# Altium PCB Transmitter.PcbDoc
Units mm, origin at the board's own origin, x right, y up, seen from the top; angles counter-clockwise.
Board outline 50 x 40 mm, 2 copper layers (Top Layer, Bottom Layer); 14 components, 19 nets, 68 pads, 7 vias.
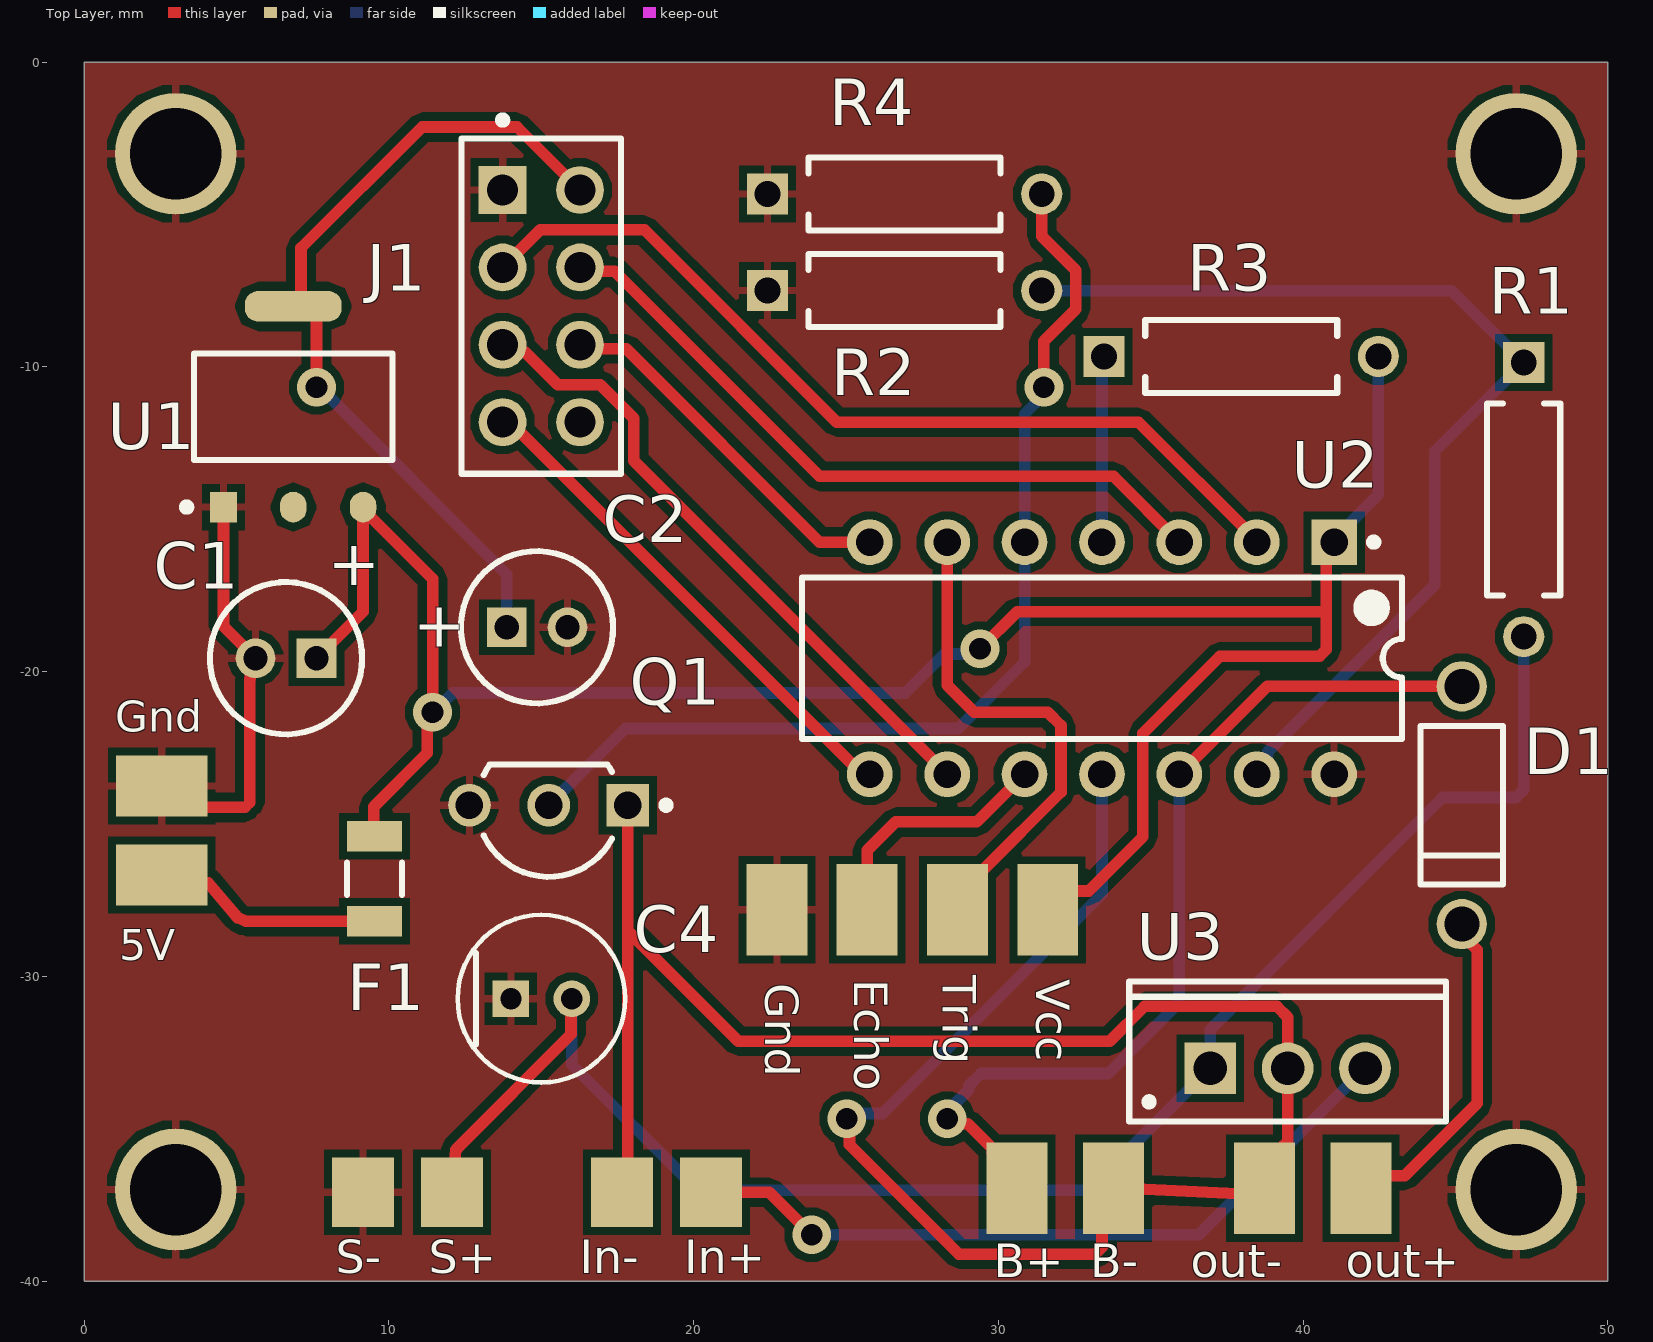
[diagram p0: Top Layer view]
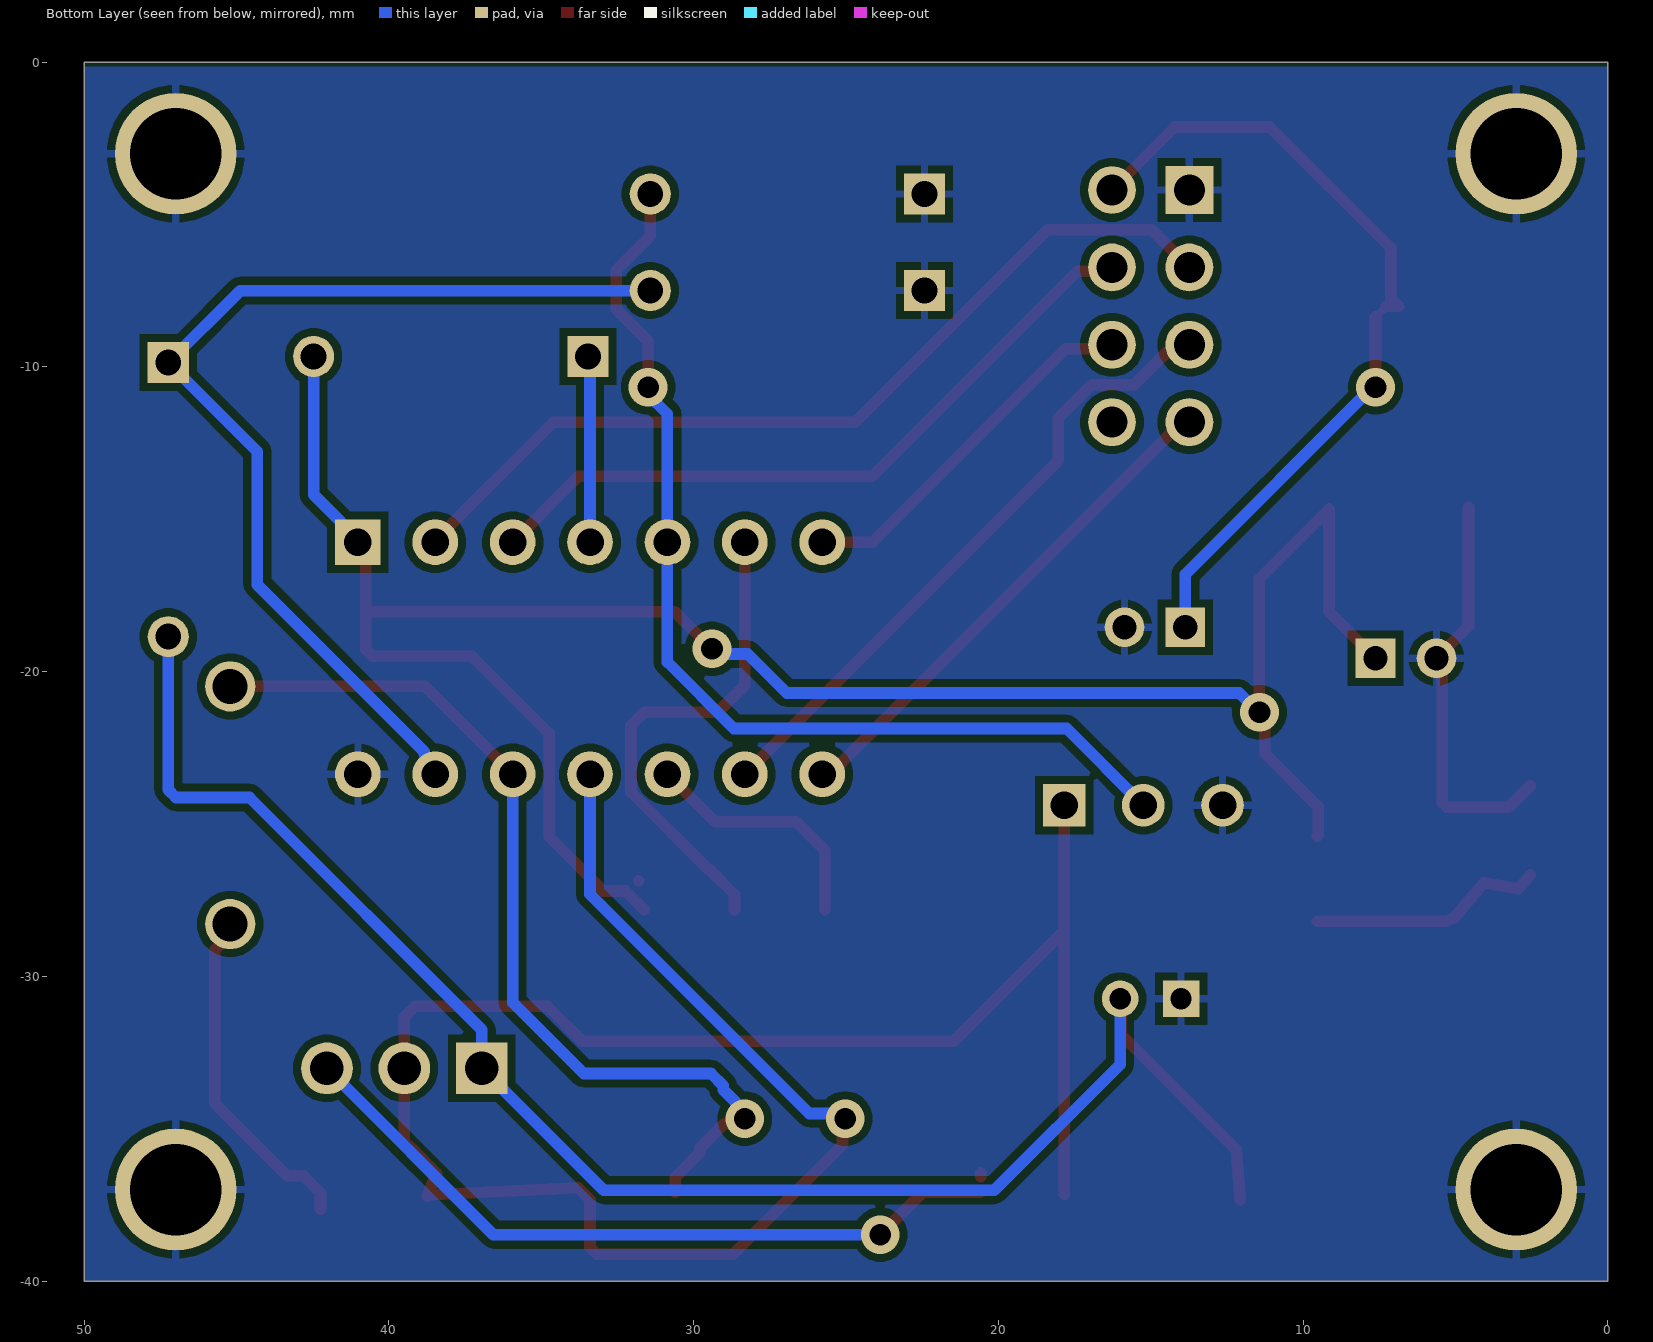
[diagram p1: Bottom Layer view, seen from below]

## Layer stack, top to bottom
Top Solder: solder mask 0.0102, Solder Resist, Dk 3.5
Top Layer: signal copper 0.0356
Dielectric 1: dielectric 0.32, FR-4, Dk 4.8
Bottom Layer: signal copper 0.0356
Bottom Solder: solder mask 0.0102, Solder Resist, Dk 3.5

## Board outline
0,0 50,0 50,-40 0,-40

## Design rules (kind name [scope] priority, off if disabled: settings)
Clearance Clearance_1 [OnMid vs OnMid] p1: gap=0.254 ignorepadtopadclearanceinfootprint=FALSE sourcerule=38 cellrowname=All cellrowtype=0 cellcolname=All cellcoltype=0 innerlayers=TRUE
Clearance Clearance_2 [(ExistsOnLayer('Top Layer') Or ExistsOnLayer('Bottom Layer')) vs (ExistsOnLayer('Top Layer') Or ExistsOnLayer('Bottom Layer'))] p2: gap=0.254 ignorepadtopadclearanceinfootprint=FALSE sourcerule=38 cellrowname=All cellrowtype=0 cellcolname=All cellcoltype=0 outerlayers=TRUE
Clearance [All] p3: gap=0.254 ignorepadtopadclearanceinfootprint=FALSE ismatrix=TRUE
HoleSize MaxMinHoleSize_2 [All] p1: absolutevalues=TRUE maxlimit=4.54 minlimit=0.025 maxpercent=80.000 minpercent=20.000
PolygonConnect [All] p1: connectstyle=Relief reliefconductorwidth=0.254 reliefentries=4 polygonreliefangle="90 Angle" airgapwidth=0.254
RoutingVias [All] p1: holewidth=0.711 width=1.27 viastyle="Through Hole" minholewidth=0.711 minwidth=1.27 maxholewidth=0.711 maxwidth=1.27
SilkToSolderMaskClearance SilkToSolderMaskClearance_1 [All] p1: minsilkscreentomaskgap=0 clearancetoexposedcopper=TRUE
SilkToSolderMaskClearance [IsPad] p2: minsilkscreentomaskgap=0.254 clearancetoexposedcopper=TRUE
SolderMaskExpansion [All] p1: expansion=0.102 istentingtop=FALSE
Width MaxMinWidth_1 [All] p1: maxlimit=0.381 minlimit=0.254 preferedwidth=0.254 minimp=50.000000 maximp=50.000000 favimp=50.000000
Width MaxMinWidth_2 [All] p2: maxlimit=0.254 minlimit=0.254 preferedwidth=0.254
28 further rules are at their usual default settings.

## Components (designator, comment, footprint, x,y, rotation, side; value= is the part's Value field where it differs from the comment)
C1 "ECA-1HHG010" CAPPR55-200-1100X500X1200 6.62,-19.558 r180 top value=1µF
C2 "ECA-1HHG010" CAPPR55-200-1100X500X1200 14.859,-18.542 r0 top value=1µF
C4 "EEUFR1H100" FP-RAD-TH-D_5_0_5-L_11_1-MFG 15.002,-30.734 r0 top
D1 "1N4007" FAIR-DO-41-2 45.212,-24.384 r270 top
F1 "1206L050/15YR" FP-1206L-MFG 9.525,-26.797 r90 top value=0.15-0.75Ω
J1 "PPTC042LFBN-RC" FP-PPTC042LFBN-RC-MFG 15,-8 r270 top
Q1 "BS170RLRAG" ONSC-TO-92-3-29-11_AM_BL 15.24,-24.384 r180 top
R1 "MFR-25FBF52-1K" RESA60-630X240 47.244,-14.351 r270 top value=500k
R2 "MFR-25FBF52-1K" RESA60-630X240 26.924,-7.493 r0 top value=500k
R3 "MFR-25FBF52-1K" RESA60-630X240 37.973,-9.652 r0 top value=10k
R4 "MFR-25FBF52-1K" RESA60-630X240 26.924,-4.318 r0 top value=10k
U1 "AMS1117-3.3" FP-AMS1117-IPC_C 6.858,-11.303 r90 top
U2 "ATtiny84-20PU" 14P3 33.401,-19.558 r270 top
U3 "L7805CV" TO220 39.497,-33.02 r0 top

## Footprints (in the part's own frame and the unit in brackets; to place one, negate y for a bottom-side part, rotate by r counter-clockwise, add the part's x,y. Pads: shape width x height; smd on the part's side, far side on the other; paste and mask are expansions set on the pad)
14P3 [mm] "DIP, 14-Pin, Row Spacing 7.62 mm, Pitch 2.54 mm"
  rect 1.5x1.5 hole 0.9: 1(-3.81,7.62)
  round 1.5 hole 0.9: 2(-3.81,5.08) 3(-3.81,2.54) 4(-3.81,0) 5(-3.81,-2.54) 6(-3.81,-5.08) 7(-3.81,-7.62) 8(3.81,-7.62) 9(3.81,-5.08) 10(3.81,-2.54) 11(3.81,0) 12(3.81,2.54) 13(3.81,5.08) 14(3.81,7.62)
  silkscreen extent -3.93,-9.85 2.65,9.85, body extent -3.55,-9.85 3.55,9.85, height 5.33
CAPPR55-200-1100X500X1200 [mm] "THD, 2-Leads, Dia 5mm, Pin Spacing 2mm"
  rect 1.3x1.3 hole 0.8: 1(-1,0)
  round 1.3 hole 0.8: 2(1,0)
  silkscreen extent -2.5,-2.5 2.5,2.5, body extent -2.5,-2.5 2.45,2.5, height 12
FAIR-DO-41-2 [mm] "THD, 2-Leads, Body 5.2x2.72mm, Pin Spacing 7.8mm"
  round 1.65 hole 1.15: 1(-3.9,0) 2(3.9,0)
  silkscreen extent -2.6,-1.35 2.6,1.35, body extent -4.29,-1.17 4.29,1.17, height 2.35
FP-1206L-MFG [mm]
  rect 1x1.8 smd paste+0 mask+0: 1(-1.4,0) 2(1.4,0)
  silkscreen extent -0.53,-0.9 0.53,0.9, body extent -2,-1 2,1, height 0.25
FP-AMS1117-IPC_C [mm]
  rect 1.004x0.872 smd paste+0 mask+0: 1(-3.295,2.29)
  rrect100% 1.004x0.872 smd paste+0 mask+0: 2(-3.295,0) 3(-3.295,-2.29)
  rrect87% 1.004x3.182 smd paste+0 mask+0: 4(3.295,0)
  silkscreen extent -3.42,-3.25 1.75,3.62, body extent -3.9,-3.35 3.9,3.35, height 0.25
FP-PPTC042LFBN-RC-MFG [mm]
  rect 1.57x1.57 hole 1.02 paste-2539.97 mask+0: 1(-3.81,-1.27)
  round 1.57 hole 1.02 paste-2539.97 mask+0: 2(-3.81,1.27) 3(-1.27,-1.27) 4(-1.27,1.27) 5(1.27,-1.27) 6(1.27,1.27) 7(3.81,-1.27) 8(3.81,1.27)
  silkscreen extent -6.23,-2.62 5.51,2.62, body extent -5.61,-2.72 5.61,2.72, height 0.25
FP-RAD-TH-D_5_0_5-L_11_1-MFG [mm]
  rect 1.2x1.2 hole 0.7 paste-2539.97 mask+0: 1(-1,0)
  round 1.2 hole 0.7 paste-2539.97 mask+0: 2(1,0)
  silkscreen extent -2.75,-2.75 2.75,2.75, body extent -2.85,-2.85 2.85,2.85, height 0.25
ONSC-TO-92-3-29-11_AM_BL [mm] "TO, 3-Leads, Body Dia 4.7mm, Pitch 2.6mm"
  rect 1.4x1.4 hole 0.9: 1(-2.6,0)
  round 1.4 hole 0.9: 2(0,0) 3(2.6,0)
  silkscreen extent -3.98,-1.34 2.13,2.35, body extent -2.84,-1.34 2.84,2.35, height 5.33
RESA60-630X240 [mm] "Axial Resistor, 2-Leads, Dia 2.4mm, Body Length 6.3mm"
  rect 1.35x1.35 hole 0.85: 1(-4.5,0)
  round 1.35 hole 0.85: 2(4.5,0)
  silkscreen extent -3.15,-1.2 3.15,1.2, body extent -4.77,-1.19 4.77,1.2, height 2.4
TO220 [mm] "TO, Thru-Hole, Vertical, Heatsink Mounted; 3 In-Line Leads; Pitch 2.54 mm"
  rect 1.7x1.7 hole 1.1: 1(-2.54,0)
  round 1.7 hole 1.1: 2(0,0) 3(2.54,0)
  silkscreen extent -5.2,-1.75 5.2,2.85, body extent -5.25,-1.8 5.25,2.9, height 19.7

## Part data
C1 C2: library part CMP-001-00024-7, "Aluminum Electrolytic Capacitor, 1 uF, +/- 20%, 50 V, -55 to 105 degC, 2-Pin THD, RoHS, Bulk", Capacitor Type=Electrolytic, Case/Package=Radial, Manufacturer=Panasonic, Max Operating Temperature=105°C, Min Operating Temperature=-55°C, Package Description="2-Pin Radial Lead, Dia 5 mm, Height 12 mm", Package Quantity=200, Package Reference=CAPPR55-200-1100X500X1200, Ripple Current=10mA, Tolerance=20%, Voltage Rating=50V, Datasheet URL=https://datasheet.ciiva.com/7275/94060-7275472.pdf, Datasheet Version=Mar-05, Diameter=5mm, Lead Pitch=2mm, Manufacturer URL=http://www.panasonic.com/, Mounting Technology=TH, Packaging=Bulk, Pins=2, Ripple Current (AC)=10mA, RoHS Compliant=True
C4: library part CMP-05427-001295-1, "Aluminum Electrolytic Capacitors (Radial Lead Type) 10uF ±20% 50V", Capacitance=10uF, Case/Package=Radial, Max Operating Temperature=105°C, Min Operating Temperature=-40°C, Ripple Current (AC)=250mA, Tolerance=20%, Voltage=50V, Construction=RADIAL, Diameter=5mm, Height=11mm, Impedance=340mR, Lead Diameter=0.5mm, Lead Pitch=2mm, Life (Hours)=5000Hour, REACH SVHC=Yes, RoHS Compliant=Yes, Series="FR Radial", Termination=Radial, Voltage Rating=50V
D1: library part CMP-004-00007-2, "General Purpose Rectifier, 1.1 V, 1.0 A, -55 to 175 degC, 2-Pin DO-41, RoHS, Tape and Reel", Case/Package=DO-41-2, Forward Current=1A, Forward Voltage=1.1V, Manufacturer=Fairchild, Max Operating Temperature=175°C, Max Surge Current=30A, Min Operating Temperature=-55°C, Package Description="2-Pin Axial Lead, Dia 2.375 mm, Body Length 4.63 mm", Package Quantity=5000, Package Version="Rev. 2, 09/2008", Peak Reverse Current=5uA, Datasheet URL=https://www.fairchildsemi.com/datasheets/1N/1N4007.pdf, Datasheet Version="Rev. 1.1.0, 11/2014", Elements=1, Manufacturer URL=https://www.fairchildsemi.com/, Mounting Technology=TH, Package Reference=DO-41-2, Package URL=http://www.fairchildsemi.com/dwg/DO/DO41A.pdf, Packaging=TapeandReel, Pins=2, RoHS Compliant=True
F1: library part CMP-08606-000030-1, "PTC RESET FUSE 15V 500MA 1206", Ambient Temperature Range High=+85°C, Ambient Temperature Range Low=-40°C, Current Rating=100A, Hold Current=0.5A, Manufacturer="Littelfuse Inc", Package=1206L, Resistance=0.15-0.75Ω, Temperature="-40°C to +85°C", Trip Current=1A, Voltage Rating=15V, Automotive=No, Category=Fuse, ComponentLink2Description=Datasheet, ComponentLink2URL=https://www.littelfuse.com/~/media/electronics/datasheets/resettable_ptcs/littelfuse_ptc_1206l_datasheet.pdf.pdf, Device Class L1="Circuit Protection", Device Class L2="PTC Resettable Fuses", Device Class L3=unset, Digikey Description="PTC RESET FUSE 15V 500MA 1206", Height=0.75mm, Lead Free=Yes, Manufacturer Part Number=1206L050/15YR, Mouser Description="Resettable Fuses - PPTC 15V 1206 .500A POLYFUSE", Octopart=https://octopart.com/1206l050%2F15yr-littelfuse-673645, RoHS=TRUE, Temperature Range High=+85°C, Temperature Range Low=-40°C, Trip Time=0.1s
J1: library part CMP-25680-000004-1, "CONN HDR 8POS 0.1 TIN PCB", Current Rating=3A, Manufacturer=Sullins, Temperature="-40°C to +105°C", Temperature Range High=+105°C, Temperature Range Low=-40°C, Voltage Rating=250V, Automotive=No, Category=Conn, ComponentLink2Description=Datasheet, ComponentLink2URL=https://drawings-pdf.s3.amazonaws.com/10492.pdf, Conn Gender=Female, Conn Orientation=Straight, Contact Material=Tin,Nickel, Device Class L1=Connectors, Device Class L2="Headers and Wire Housings", Device Class L3=unset, Digikey Description="CONN HDR 8POS 0.1 TIN PCB", Height=8.65mm, Is Female=yes, Lead Free=Yes, Manufacturer Part Number=PPTC042LFBN-RC, Number of Contacts=8, Number of Rows=2, Octopart=https://octopart.com/pptc042lfbn-rc-sullins-271088, Package=PPTC042LFBN-RC, Pitch=2.54mm, RoHS=TRUE
Q1: library part CMP-1058-00945-1, "Small Signal MOSFET, 500 mA, 60 V, N-Channel, 3-Pin TO-92, Pb-Free, Tape and Reel", Manufacturer="On Semiconductor", Package Type=TO-92, Channel Polarity="N Channel", ComponentLink1Description="Manufacturer URL", ComponentLink1URL=http://www.onsemi.com/, ComponentLink2Description=Datasheet, ComponentLink2URL=http://www.onsemi.com/pub_link/Collateral/BS170-D.PDF, ComponentLink3Description="Package Specification", ComponentLink3URL=http://www.onsemi.com/pub_link/Collateral/MAC97-D.PDF, Configuration=Single, DatasheetVersion="Rev. 6", ID Max (A)=0.5, Mounting Technology="Through Hole", PackageDescription="3-Pin Transistor Outline, Body 4.825 x 3.685 mm, Pitch 1.27 mm", PackageReference=TO-92-3-29-11_AM_BL, PackageVersion="Rev. AM", Packing="Tape and Reel", PartNumber=BS170RLRAG, PD Max (W)=0.35, RoHS=Pb-Free, V(BR)DSS Min (V)=60, VGS Max (V)=20, VGS(th) Max (V)=3
R1 R2 R3 R4: library part CMP-009-00048-4, "Axial Resistor, 1 KOhm, +/- 1%, 250 mW, -55 to 155 degC, 2-Pin THD, RoHS, Bulk", Case/Package=Axial, Manufacturer=Yageo, Max Operating Temperature=155°C, Min Operating Temperature=-55°C, Package Description="2-Pin Axial Lead, Dia 2.4 mm, Body Length 6.3 mm", Package Quantity=200, Package Reference=MFR-25, Power=250mW, Tolerance=1%, Voltage Rating=250V, Composition=CarbonFilm, Datasheet URL=http://www.yageo.com/documents/recent/Yageo%20LR_MFR_2013.pdf, Datasheet Version=Apr-13, Manufacturer URL=http://www.yageo.com/, Mounting Technology=TH, Packaging=Bulk, RoHS Compliant=True
U1: library part CMP-209535-000001-1, "LDO Voltage Regulators 1A, 3.3V", Dropout Voltage=1.1V, Manufacturer="Advanced Monolithic Systems", Max Junction Temp=+125°C, Max Power Dissipation=1.2W, Max Supply Voltage=15V, Nominal Supply Current=5mA, Output Current=1A, Output Voltage=3.3V, Package=AMS1117, Temperature="-40°C to +125°C", Temperature Range Low=-40°C, Automotive=No, Category=IC, ComponentLink2Description=Datasheet, ComponentLink2URL=http://www.advanced-monolithic.com/pdf/ds1117.pdf, Device Class L1="Integrated Circuits (ICs)", Device Class L2="Power Management ICs", Device Class L3="Voltage Regulators - Linear", Height=1.8mm, Ipc Land Pattern Name=SOT229P700X180-4, Lead Free=Yes, Manufacturer Part Number=AMS1117-3.3, Number Of Outputs=1, Octopart=https://octopart.com/ams1117-3.3-advanced+monolithic+systems-25899300, Output Type=Fixed, RoHS=TRUE, Standoff Height=0.64mm, Temperature Range High=+125°C
U2: library part CMP-0093-00026-2, "8-bit AVR Microcontroller, 20MHz, 2.7-5.5V, 8KB Flash, 512 Bytes EEPROM, 512 Bytes SRAM, 14-pin PDIP, Industrial Grade (-40°C to 85°C), Pb-Free", Code_JEDEC=MS-001-AA, ComponentLink1Description="Manufacturer URL", ComponentLink1URL=http://www.atmel.com/, ComponentLink2Description="ATtiny24/44/84 Datasheet", ComponentLink2URL=http://www.atmel.com/dyn/resources/prod_documents/doc8006.pdf, ComponentLink3Description="ATtiny24/44/84 Summary", ComponentLink3URL=http://www.atmel.com/dyn/resources/prod_documents/8006S.pdf, DatasheetVersion="revK, Oct-2010", PackageDescription="14-Lead Plastic Dual In-Line, 300 mil/7.62 mm Wide Body (PDIP)", PackageReference=14P3, PackageVersion="revB, Oct-2010", RevisionNote="DatasheetVersion updated. URLs added."
U3: library part CMP-0244-00483-1, "Positive Voltage Regulator, 5V, 3-Pin TO-220", ComponentLink1Description="Manufacturer URL", ComponentLink1URL=http://www.st.com, ComponentLink2Description=Datasheet, ComponentLink2URL=http://www.st.com/internet/com/TECHNICAL_RESOURCES/TECHNICAL_LITERATURE/DATASHEET/CD00000444.pdf, ComponentLink3Description="Package Specification", ComponentLink3URL=http://www.st.com/internet/com/TECHNICAL_RESOURCES/TECHNICAL_LITERATURE/PACKAGE_INFORMATION/CD00004649.pdf, DatasheetVersion=16/11/2011, PackageDescription="TO, Thru-Hole, Vertical, Heatsink Mounted; 3 In-Line Leads; Pitch 2.54 mm", PackageReference=TO220, PackageVersion=ver3.0

## Free pads (board coordinates)
  round 4 hole 3: 46(3,-37) 46(3,-3) 46(47,-37) 46(47,-3)
  rect 3x2 smd: 47(2.54,-26.67) 47(2.54,-23.749)
  rect 2.032x2.286 smd: 47(9.144,-37.084) 47(12.065,-37.084) 47(17.653,-37.084) 47(20.574,-37.084)
  rect 2x3 smd: 47(22.733,-27.813) 47(25.696,-27.813) 47(28.66,-27.813) 47(30.607,-36.957) 47(31.623,-27.813) 47(33.782,-36.957) 47(38.735,-36.957) 47(41.91,-36.957)

## Via types
v1: diameter 1.27, hole 0.711, Top Layer to Bottom Layer, 7 vias

## Nets (pads, with @x,y where several pads share a name; then routed paths per layer and width w, separated by ;. In a path a pad name is that pad's centre, name@x,y a point inside that pad or via, vN(x,y) a via of type N, cw(c..) or ccw(c..) an arc to the next point about the centre after c; other vN are vias at no path point)
GND: C1.2 C2.2 C4.1 J1.1 pad.46 pad.47@2.54,-23.749 pad.47@9.144,-37.084 pad.47@22.733,-27.813 Q1.3 R2.1 R4.1 U1.1 U2.14 | length 13.5
  Top Layer w0.254: 5.275,-24.454 5.434,-24.295
  Top Layer w0.381: pad.47@2.54,-23.749 3.245,-24.454 5.275,-24.454 ; U1.1 4.568,-18.506 C1.2 5.444,-19.734 5.444,-20.23 5.434,-20.241 5.434,-24.295
Net3.7V_1: D1.1 pad.47@30.607,-36.957 U2.12 | length 31.3
  Top Layer w0.381: v1(28.321,-34.671) 28.491,-34.841 28.991,-34.841 29.797,-35.648 29.797,-35.794 30.607,-36.603 pad.47@30.607,-37.084 ; U2.12 38.825,-20.484 D1.1 D1.1@45.429,-20.701
  Bottom Layer w0.381: v1(28.321,-34.671) 28.321,-34.43 29.03,-33.722 29.03,-33.591 29.432,-33.189 33.613,-33.189 35.941,-30.861 U2.12
Net3.7V_2: pad.47@17.653,-37.084 pad.47@33.782,-36.957 pad.47@38.735,-36.957 Q1.1 U2.11 U3.2 | length 76.1
  Top Layer w0.381: pad.47@17.84,-37.151 17.84,-28.508 ; Q1.1 17.84,-28.508 ; v1(25.029,-34.671) 25.115,-34.757 25.115,-35.529 28.702,-39.116 33.178,-39.116 33.401,-38.893 33.401,-37.338 pad.47@33.782,-36.957 ; pad.47@33.789,-36.944 38.556,-37.171 38.735,-37.211 38.439,-36.457 39.248,-35.648 39.274,-35.648 39.497,-35.424 U3.2 39.497,-31.338 39.147,-30.988 34.798,-30.988 33.655,-32.131 21.463,-32.131 17.84,-28.508
  Bottom Layer w0.381: v1(25.029,-34.671) 25.199,-34.501 26.205,-34.501 33.401,-27.305 33.401,-25.146 U2.11
Net4.2V_1: pad.47@20.574,-37.084 U3.3 | length 24.8
  Top Layer w0.381: pad.47@20.574,-37.084 22.479,-37.084 v1(23.876,-38.481) ; pad.47@20.574,-36.576 pad.47@20.574,-36.449 ; U3.3@41.68,-33.02 U3.3
  Bottom Layer w0.381: v1(23.876,-38.481) 36.576,-38.481 U3.3
Net7V_1: C4.2 pad.47@12.065,-37.084 R1.2 U3.1 | length 54.5
  Top Layer w0.381: pad.47@12.065,-37.338 12.192,-35.687 15.973,-31.906 15.973,-30.763 C4.2
  Bottom Layer w0.381: C4.2 16.002,-32.893 20.13,-37.02 32.956,-37.02 U3.1 36.957,-31.75 44.577,-24.13 46.99,-24.13 47.244,-23.876 R1.2
NetC1_1: C1.1 F1.2 pad.47@31.623,-27.813 R3.2 U1.3 U2.1 | length 73.8
  Top Layer w0.254: U1.3@9.148,-14.664 U1.3
  Top Layer w0.381: C1.1 9.148,-18.03 9.148,-14.664 11.43,-16.946 v1(11.43,-21.336) 11.26,-21.506 11.26,-22.668 9.497,-24.431 9.497,-25.369 F1.2 ; v1(29.4,-19.25) 30.616,-18.034 40.767,-18.034 ; pad.47@31.623,-27.813 32.237,-27.199 32.971,-27.199 34.747,-25.424 34.747,-23.863 34.746,-22.023 37.274,-19.495 40.544,-19.495 40.767,-19.272 40.767,-18.034 ; pad.47@31.802,-26.864 pad.47@31.806,-26.868 ; U2.1 40.767,-16.002 40.767,-18.034
  Bottom Layer w0.381: v1(11.43,-21.336) 11.463,-21.336 12.098,-20.701 26.945,-20.701 28.226,-19.42 29.23,-19.42 v1(29.4,-19.25) ; U2.1 41.581,-15.188 41.581,-15.083 42.473,-14.19 R3.2
NetC2_1: C2.1 J1.2 U1.4 | length 27.3
  Top Layer w0.254: U1.4@7.377,-8.117 U1.4@7.62,-8.36
  Top Layer w0.381: U1.4@7.268,-8.008 U1.4 7.112,-7.754 7.112,-6.096 11.087,-2.121 14.201,-2.121 J1.2 ; v1(7.62,-10.668) U1.4@7.62,-8.36
  Bottom Layer w0.381: v1(7.62,-10.668) 7.726,-10.668 13.859,-16.801 C2.1
NetC3_2: D1.2 pad.47@41.91,-36.957 | length 11.3
  Top Layer w0.381: pad.47@42.249,-37.636 42.249,-37.098 42.804,-36.542 43.343,-36.542 45.72,-34.165 45.72,-29.135 45.212,-28.627 D1.2
NetF1_1: F1.1 pad.47@2.54,-26.67 | length 7.8
  Top Layer w0.381: pad.47@2.54,-26.67 2.92,-27.124 4.064,-26.924 5.022,-28.068 5.297,-28.197 F1.1
NetJ1_3: J1.3 U2.2 | length 29.5
  Top Layer w0.381: J1.3 14.96,-5.5 18.385,-5.5 24.696,-11.811 34.602,-11.811 38.481,-15.69 U2.2
NetJ1_4: J1.4 U2.3 | length 23.4
  Top Layer w0.254: J1.4 J1.4@16.403,-6.863
  Top Layer w0.381: J1.4@16.403,-6.863 17.404,-6.863 24.13,-13.589 33.782,-13.589 U2.3
NetJ1_5: J1.5 U2.9 | length 21.2
  Top Layer w0.381: J1.5 13.958,-9.498 14.451,-9.498 15.533,-10.58 16.931,-10.58 18.034,-11.684 18.034,-13.081 U2.9
NetJ1_6: J1.6 U2.7 | length 12.2
  Top Layer w0.254: J1.6 J1.6@16.403,-9.403
  Top Layer w0.381: J1.6@16.403,-9.403 17.785,-9.403 24.13,-15.748 U2.7
NetJ1_7: J1.7 U2.8 | length 16.8
  Top Layer w0.254: J1.7 J1.7@13.976,-11.81 ; U2.8@25.535,-23.368 U2.8
  Top Layer w0.381: J1.7@13.976,-11.81 U2.8@25.535,-23.368
NetQ1_2: Q1.2 R4.2 U2.5 | length 34.1
  Top Layer w0.381: R4.2 31.424,-5.709 32.544,-6.828 32.544,-8.104 31.496,-9.152 v1(31.496,-10.668)
  Bottom Layer w0.381: Q1.2 17.759,-21.865 28.681,-21.865 30.861,-19.685 30.861,-11.544 31.496,-10.909 v1(31.496,-10.668)
NetR1_1: R1.1 R2.2 U2.13 | length 33.9
  Bottom Layer w0.381: R2.2 44.886,-7.493 R1.1 44.323,-12.772 44.323,-17.145 38.844,-22.624 38.844,-22.702 38.481,-23.065 U2.13
NetR3_1: R3.1 U2.4 | length 6.1
  Bottom Layer w0.381: U2.4 33.401,-9.724 R3.1
NetU2_6: pad.47@28.66,-27.813 U2.6 | length 16.5
  Top Layer w0.381: U2.6 28.321,-20.447 29.21,-21.336 31.623,-21.336 32.056,-21.769 32.056,-23.951 29.503,-26.504 29.469,-26.504 28.66,-27.313 pad.47@28.66,-27.813
NetU2_10: pad.47@25.696,-27.813 U2.10 | length 8.1
  Top Layer w0.381: pad.47@25.696,-27.813 25.696,-25.866 26.631,-24.931 29.298,-24.931 U2.10
pads on no net: J1.8 U1.2

## Polygon pours and split planes (outlines as drawn)
GND on Bottom Layer "GND_L02_P001" (solid, pour order 1): 0,-0.151 50,-0.151 50,-40 0,-40
GND on Top Layer "GND_L01_P000" (solid, pour order 0): 0,0 50,0 50,-40 0,-40

## Silkscreen, mask and mechanical layers (free items; w line width, h text height)
Top Overlay:
  text "Gnd" at 1.016,-21.971 h1.02
  text "5V" at 1.143,-29.464 h1.02
  text "Trig" at 28.18,-29.972 h1.1 r270
  text "Echo" at 25.273,-30.099 h1.1 r270
  text "Vcc" at 31.242,-30.099 h1.1 r270
  text "Gnd" at 22.352,-30.226 h1.1 r270
  text "S-" at 8.255,-39.751 h1.1
  text "S+" at 11.303,-39.751 h1.1
  text "In-" at 16.256,-39.751 h1.1
  text "In+" at 19.685,-39.751 h1.1
  text "B+" at 29.845,-39.878 h1.1
  text "B-" at 33.02,-39.878 h1.1
  text "out-" at 36.322,-39.878 h1.1
  text "out+" at 41.402,-39.878 h1.1
Mechanical 1:
  lines w0.5: 0,-40 ccw(c0.012,-39.988) 0.012,-40.005 49.988,-40.005 ccw(c49.988,-39.988) 50,-40 50,0 0,0 0,-40

## Dimensions
47,-3 to 47,-37 on Mechanical 1
3,-3 to 47,-3 on Mechanical 1
47,-3 to 50,0 on Mechanical 1
47,-3 to 50,0 on Mechanical 1

## Text inside footprints (layer, text, board x,y; h text height)
C1: Top Overlay "+" at 9.719,-15.876 h1.5 r180
C2: Top Overlay "+" at 10.795,-19.177 h1.5